# EAGLE board multi-pcb-power.v2 (EAGLE 9.6.2)
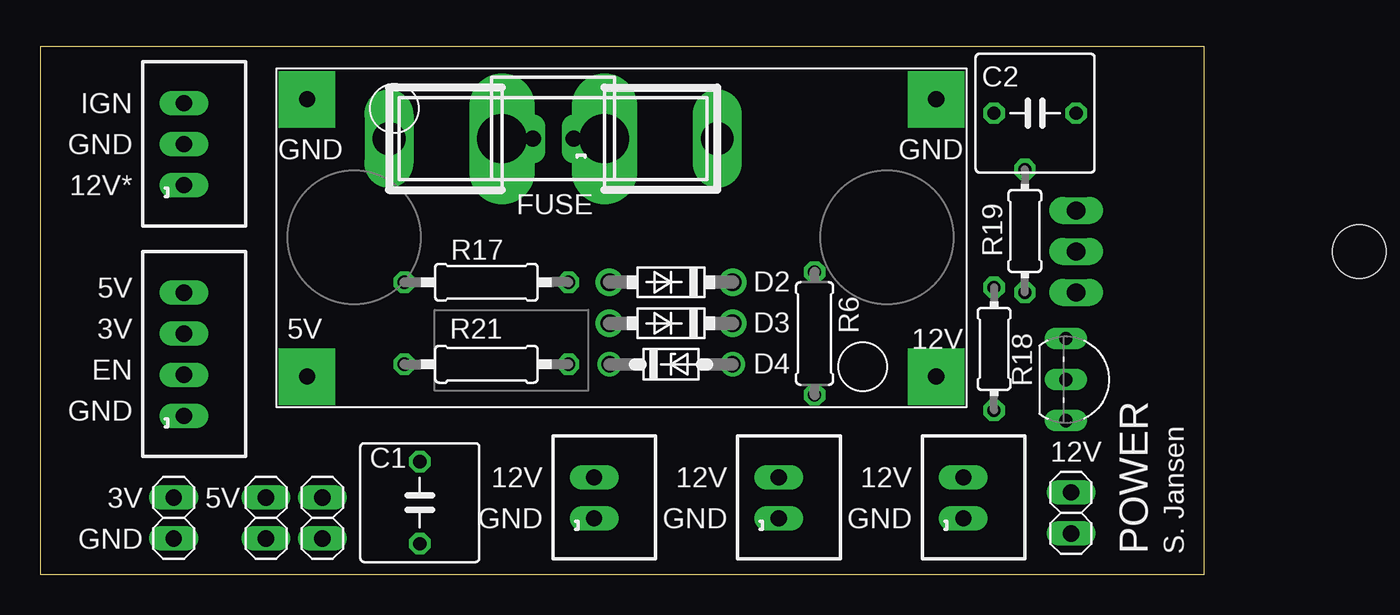
[diagram p0: board, top side]
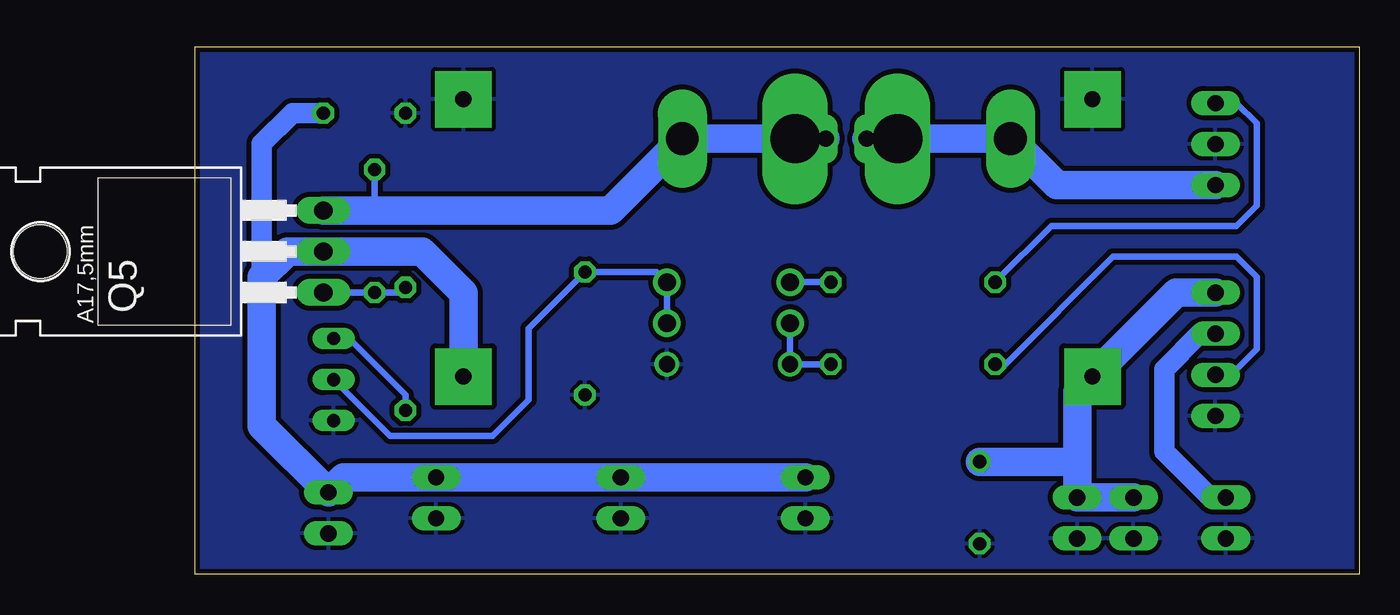
[diagram p1: board, bottom side, seen from below]

Size 72.06 x 32.69 mm. Coordinates in mm from the lower left corner, seen from the top.
Outline: 0,0 72.06,0 72.06,32.69 0,32.69 0,0
Copper layers (1*16): Top 0.035mm / dielectric 1.5mm / Bottom 0.035mm
Design rules "home-made-pcb *": minimum track width 8mil, minimum drill 0.3mm, track to track 12mil, track to pad 8mil, pad to pad 10mil, via to via 10mil, smd to smd 6mil, copper to edge 8mil, drill to drill 10mil, minimum pad ring 10mil, minimum via ring 20mil, stop-mask expansion 4mil, vias tented up to drill 0mil, thermal gap 10mil

## Footprints (pad centres in the part's own frame; a part is rotated, then mirrored left to right if it is on the bottom)
C050-075X075 = drill 0.813 octagon: 1 -2.54,0; 2 2.54,0
DO41-7.6 = drill 1.1 pad 1.7: A 3.81,0; C -3.81,0
DO41Z7.6 = drill 1: A 3.81,0; C -3.81,0
B2B-ZR2.5 = drill 1 pad 1.422 long: 1 -1.285,0; 2 1.257,0
1X02 = drill 1.016 long: 1 -1.27,0; 2 1.27,0
B3B-ZR2.5 = drill 1 pad 1.422 long: 1 -2.555,0; 2 -0.013,0; 3 2.527,0
TO220 = drill 1.118 long: 1 -2.54,-6.35; 2 0,-6.35; 3 2.54,-6.35 | hole 3.302: 0,11.176
0207/7 = drill 0.813 octagon: 1 -3.81,0; 2 3.81,0
0207/10 = drill 0.813 octagon: 1 -5.08,0; 2 5.08,0
0204/7 = drill 0.813 octagon: 1 -3.81,0; 2 3.81,0
TO92-EBC = drill 0.813 long: B 0,-1.27; C -2.54,-1.27; E 2.54,-1.27
FB-5X20 = drill 2.032 long: P$1 -10.16,0; P$4 10.16,0 | drill 3.048 long: P$2 -3.175,0; P$3 3.175,0
LM2596S = drill 1 pad 3.5 square: IN+ -19.633,8.963; IN- -19.633,-8.213; OUT+ 19.323,8.963; OUT- 19.323,-8.213
B4B-ZR2.5 = drill 1 pad 1.422 long: 1 -3.825,0; 2 -1.283,0; 3 1.257,0; 4 3.797,0

## Placement (x,y rotation side)
C1  [C050-075X075]  23.5,4.45 270 top
C2  [C050-075X075]  61.59,28.57 180 top
D2  1N40047  [DO41-7.6]  39.05,18.1 180 top
D3  1N40047  [DO41-7.6]  39.05,15.56 180 top
D4  BZX83C3V6  [DO41Z7.6]  39.05,13.02 0 top
FUSE  2.52B-ZR  [B2B-ZR2.5]  31.75,26.99 180 top
JP_PWR_3V3  [1X02]  8.26,3.49 90 top
JP_PWR_5V_1  [1X02]  17.46,3.49 90 top
JP_PWR_5V_2  [1X02]  13.97,3.49 90 top
JP_PWR_12V  [1X02]  63.82,3.81 90 top
PWR  2.53B-ZR  [B3B-ZR2.5]  8.89,26.67 90 top
Q5  TIP136  [TO220]  70.48,20 90 bottom
R6  20k  [0207/7]  47.94,14.92 90 top
R17  68k  [0207/10]  27.62,18.1 180 top
R18  10k  [0204/7]  59.05,13.97 270 top
R19  10k  [0204/7]  60.96,21.27 90 top
R21  1k  [0207/10]  27.62,13.02 180 top
T2  BC618  [TO92-EBC]  64.77,12.06 270 top
U$1  FUSE  [FB-5X20]  31.75,26.99 180 top
U$4  LM2596S  [LM2596S]  35.83,21.22 180 top
X1  2.52B-ZR  [B2B-ZR2.5]  57.15,4.76 90 top
X2  2.52B-ZR  [B2B-ZR2.5]  34.29,4.76 90 top
X3  2.52B-ZR  [B2B-ZR2.5]  45.72,4.76 90 top
X4  2.54B-ZR  [B4B-ZR2.5]  8.89,13.65 90 top

## Library data of the parts
C1 C2 = rcl; SPICEPREFIX: C
D2-D4 = diode-custom
FUSE PWR X1-X4 = con-jst-custom
JP_PWR_3V3 JP_PWR_5V_1 JP_PWR_5V_2 JP_PWR_12V = pinhead
Q5 = transistor-pnp
R6 R17-R19 R21 = rcl; SPICEPREFIX: R
T2 = transistor-npn
U$1 U$4 = samuel

## Nets
+3V3: JP_PWR_3V3.2 X4.3
+5V: C1.1 JP_PWR_5V_1.2 JP_PWR_5V_2.2 U$4.OUT+ X4.4
+12V: FUSE.2 PWR.1 U$1.P$3 U$1.P$4
GND: C1.2 C2.2 D4.A JP_PWR_3V3.1 JP_PWR_5V_1.1 JP_PWR_5V_2.1 JP_PWR_12V.1 PWR.2 R6.1 T2.E U$4.IN- U$4.OUT- X1.1 X2.1 X3.1 X4.1
IGNITION: PWR.3 R17.2
N$5: D2.C D3.C R6.2 T2.B
N$11: D3.A D4.C R21.1
N$12: D2.A R17.1
N$14: Q5.1 R18.1 R19.1
N$15: R18.2 T2.C
N$21: FUSE.1 Q5.3 R19.2 U$1.P$1 U$1.P$2
PWR_ENABLE: R21.2 X4.2
PWR_IN+: C2.1 JP_PWR_12V.2 Q5.2 U$4.IN+ X1.2 X2.2 X3.2

## Tracks (layer width: path | path; a pad name or v marks a point on that pad's centre or on a via)
+3V3
  Bottom 1.27: X4.3 9.86,14.91 12.06,12.7 12.06,7.62 9.21,4.76 JP_PWR_3V3.2
+5V
  Bottom 1.778: X4.4 11.32,17.45 U$4.OUT+ 17.46,11.3 17.46,6.99 | 17.46,6.99 JP_PWR_5V_1.2 JP_PWR_5V_2.2 | C1.1 17.46,6.99
+12V
  Bottom 1.778: PWR.1 18.72,24.11 U$1.P$4 U$1.P$3 FUSE.2
GND
  pour Bottom (isolate 0.305): -0.64,43.81 -0.64,-0.64 73.03,-0.64 73.03,43.81
  pour Bottom (isolate 0.305): -1.27,-2.54 74.3,-2.54 74.3,35.56 -1.27,35.56
IGNITION
  Bottom 0.406: PWR.3 7.61,29.2 6.35,27.94 6.35,22.86 7.62,21.59 19.05,21.59 R17.2
N$5
  Bottom 0.406: D3.C D2.C 43.5,18.73 R6.2 51.44,15.24 51.44,10.79 53.66,8.57 60.01,8.57 T2.B
N$11
  Bottom 0.406: D3.A D4.C R21.1
N$12
  Bottom 0.406: R17.1 D2.A
N$14
  Bottom 0.406: Q5.1 R19.1 59.37,17.46 R18.1
N$15
  Bottom 0.406: R18.2 59.05,11.11 62.55,14.61 T2.C
N$21
  Bottom 0.406: R19.2 60.96,22.54
  Bottom 1.778: Q5.3 60.96,22.54 46.35,22.54 U$1.P$1 U$1.P$2 FUSE.1
PWR_ENABLE
  Bottom 0.406: R21.2 21.91,13.02 15.24,19.68 7.62,19.68 6.35,18.41 6.35,13.97 7.95,12.37 X4.2
PWR_IN+
  Bottom 1.27: C2.1 66.04,28.57 67.94,26.67 67.94,18.41
  Bottom 1.778: U$4.IN+ 55.47,17.44 58.03,20 Q5.2 66.36,20 67.94,18.41 67.94,9.21 JP_PWR_12V.2 62.88,6.02 X1.2 X3.2 X2.2

## Text on the board
tPlace: POWER | S. Jansen
tNames: IGN | GND | GND | GND | 12V* | 5V | 3V | 5V | 12V | EN | GND | 12V | 12V | 12V | 12V | 3V | 5V | GND | GND | GND | GND